# Altium PCB PCB-soldermask.PcbDoc
Units mil, origin at the board's own origin, x right, y up, seen from the top; angles counter-clockwise.
Board outline 2559.06 x 1377.95 mil, 2 copper layers (Top Layer, Bottom Layer); 37 components, 24 nets, 114 pads, 11 vias.
Unrouted connection lines stored in the file: 1.
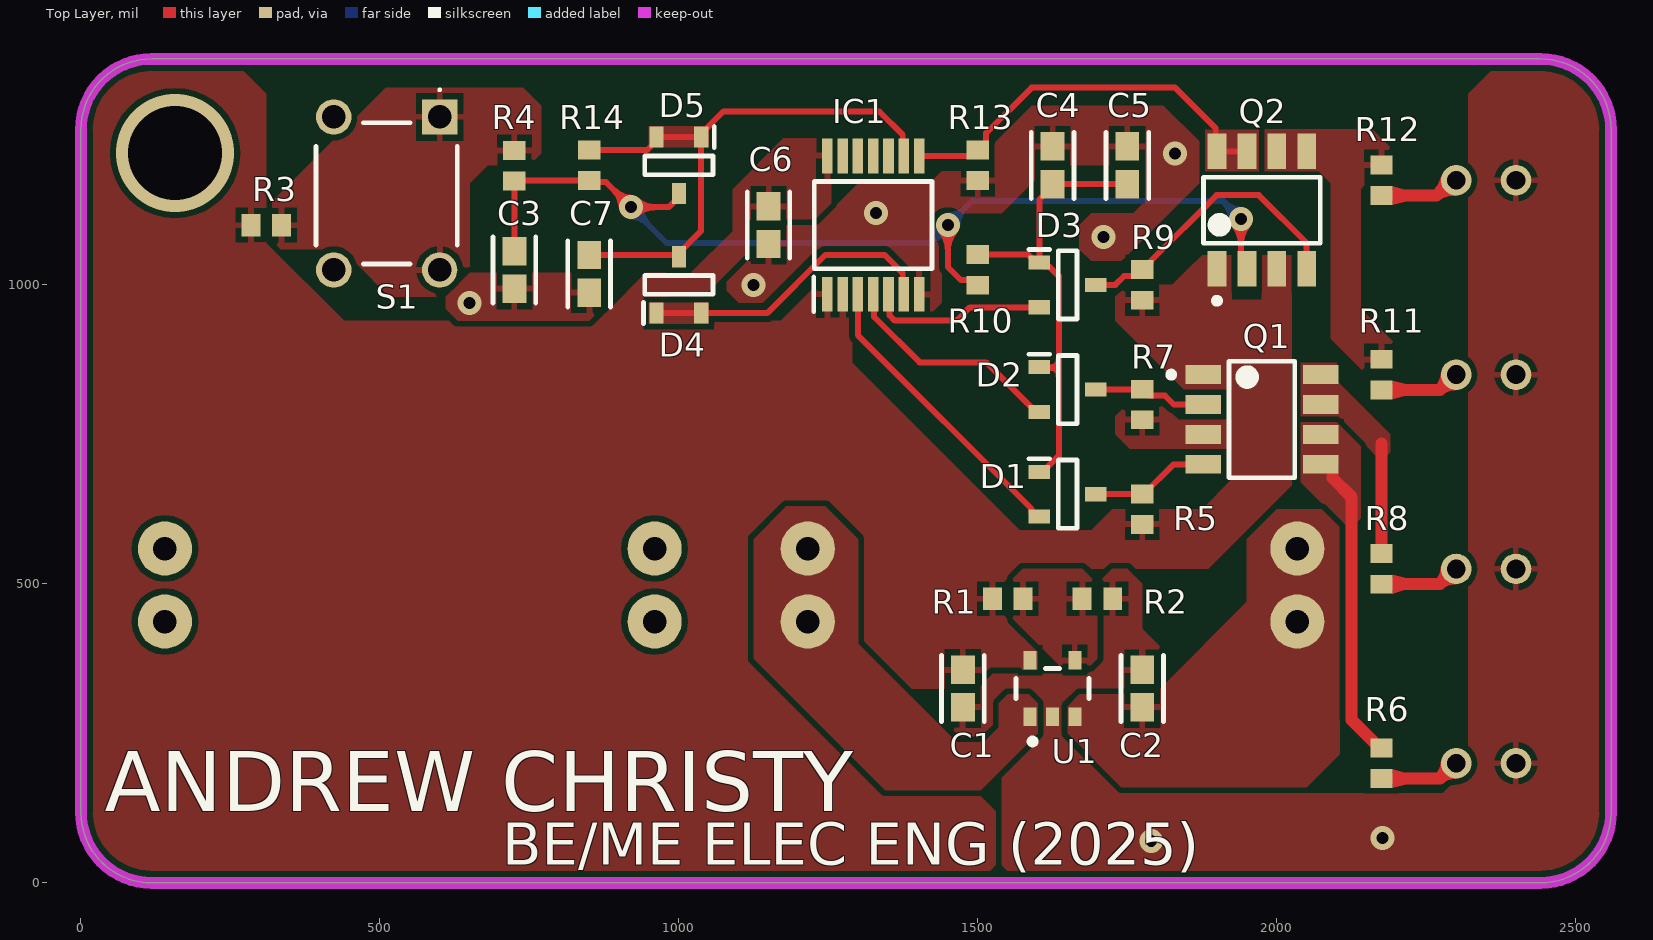
[diagram p0: Top Layer view]
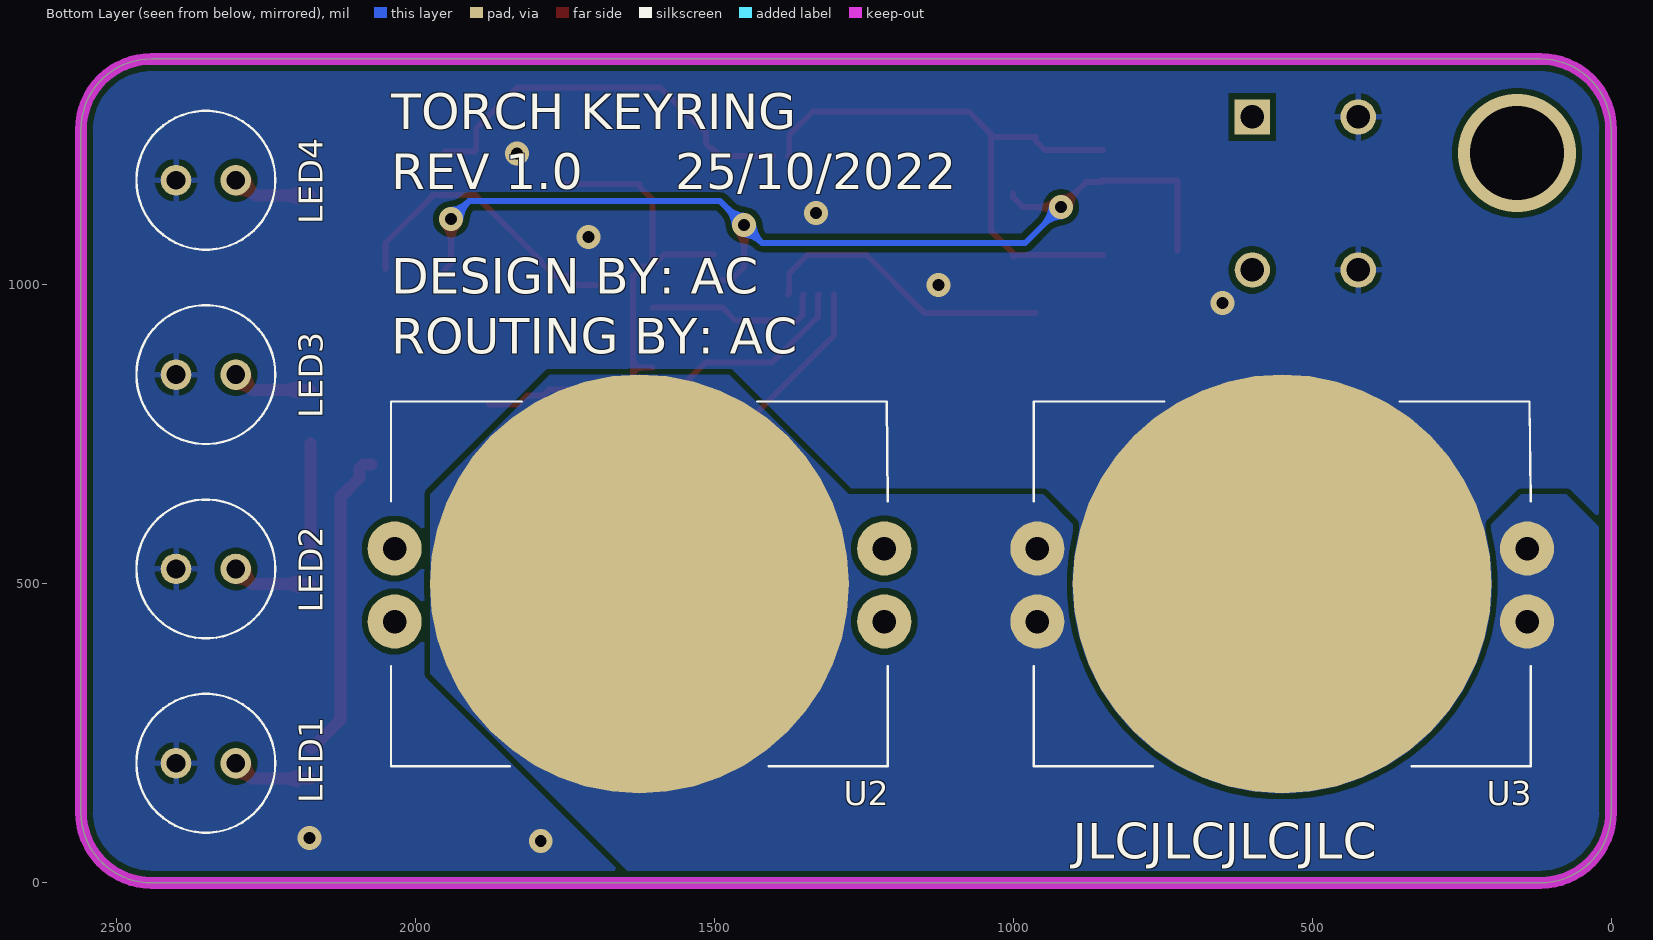
[diagram p1: Bottom Layer view, seen from below]
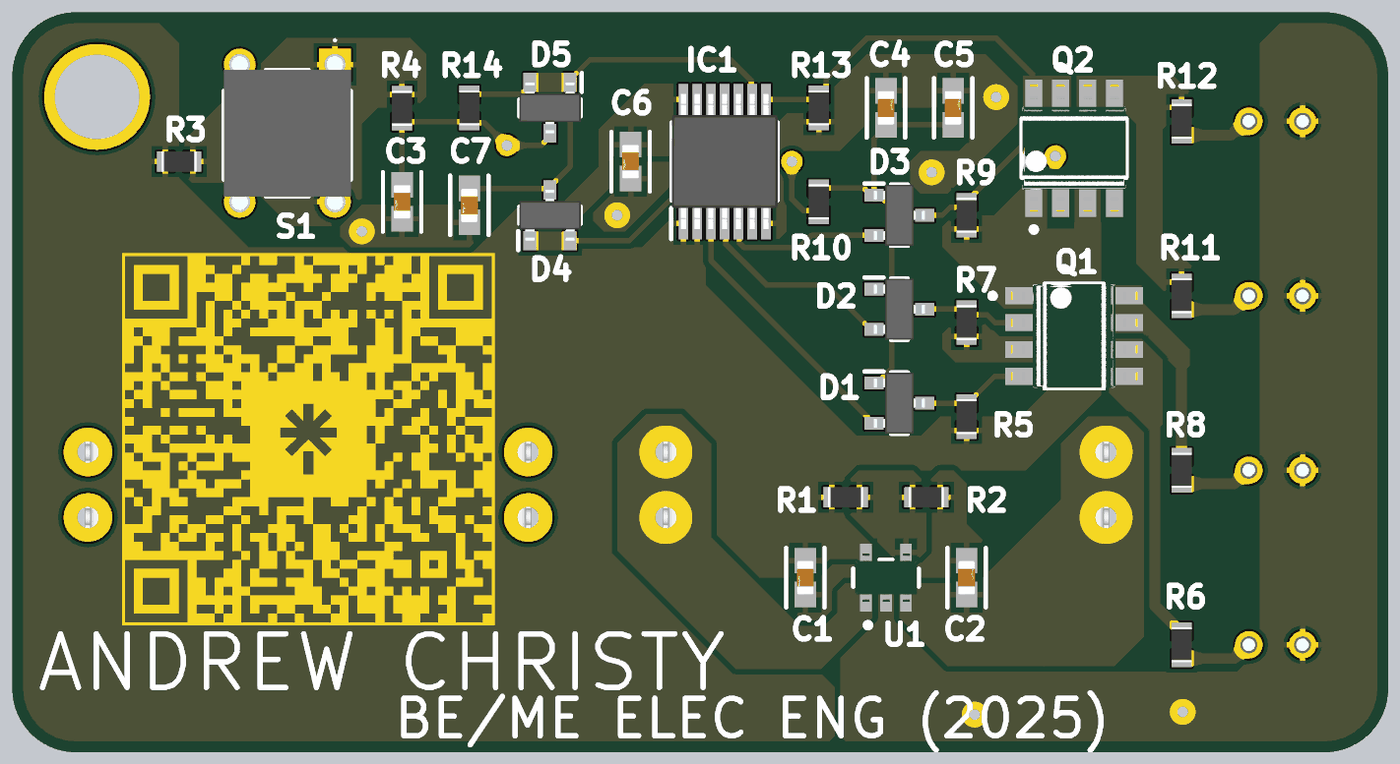
[diagram p2: 3D render of the assembled board from above, using the file's embedded part models]
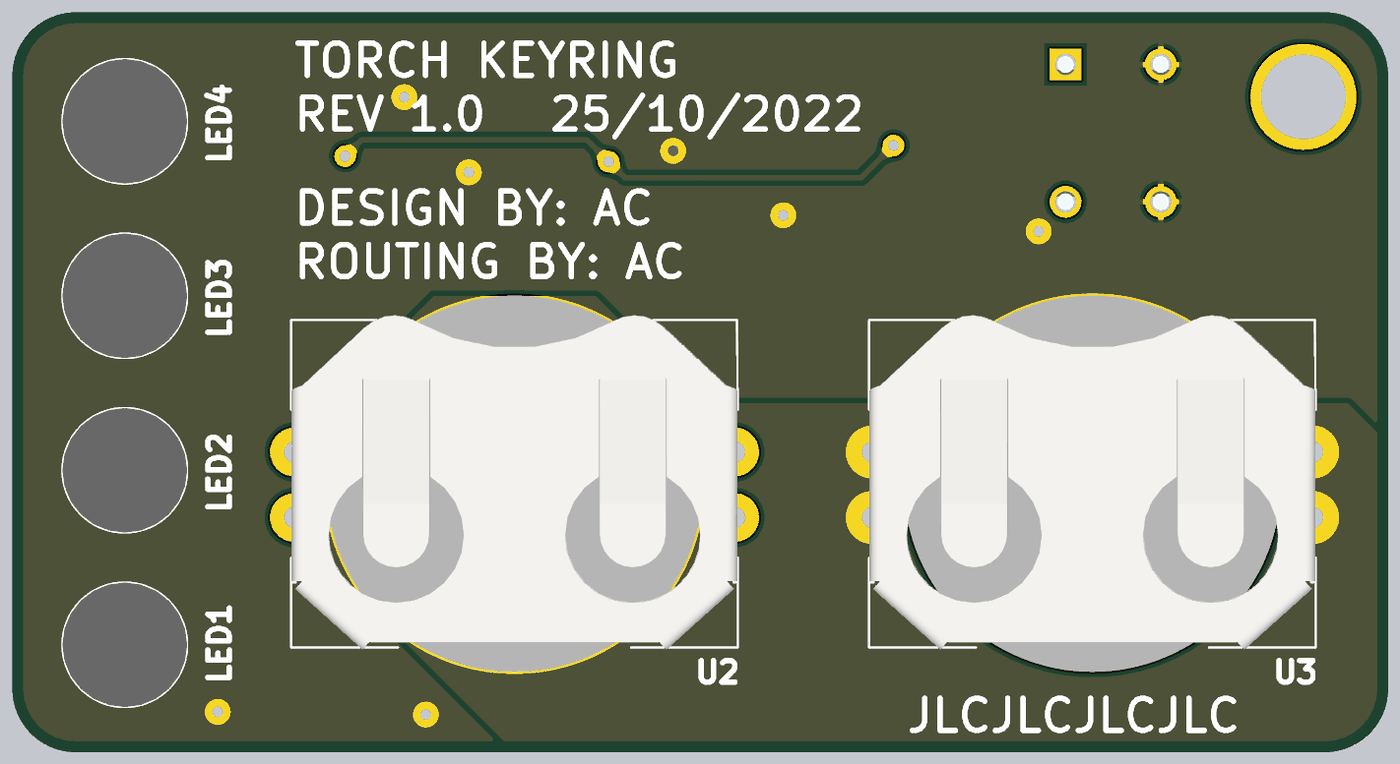
[diagram p3: 3D render of the assembled board from below, using the file's embedded part models]

## Layer stack, top to bottom
Top Solder: solder mask 0.4, Solder Resist, Dk 3.5
Top Layer: signal copper 1.4
Dielectric 1: dielectric 12.6, FR-4, Dk 4.8
Bottom Layer: signal copper 1.4
Bottom Solder: solder mask 0.4, Solder Resist, Dk 3.5

## Board outline
118.11,0 cw(c118.11,118.11) 0,118.11 0,1259.84 cw(c118.11,1259.84) 118.11,1377.95 2440.94,1377.95 cw(c2440.94,1259.84) 2559.06,1259.84 2559.06,118.11 cw(c2440.94,118.11) 2440.94,0

## Design rules (kind name [scope] priority, off if disabled: settings)
Clearance [All] p1: gap=10 ignorepadtopadclearanceinfootprint=FALSE except(0: Arc-Hole Track-Hole SMDPad-Hole THPad-Hole Via-Hole Fill-Hole Poly-Hole Region-Hole Text-Hole)
PolygonConnect [All] p1: connectstyle=Relief reliefconductorwidth=10 reliefentries=4 polygonreliefangle="90 Angle" airgapwidth=10
RoutingVias [All] p1: holewidth=28 width=50 viastyle="Through Hole" minholewidth=28 minwidth=50 maxholewidth=28 maxwidth=50
SolderMaskExpansion [All] p1: expansion=4 istentingtop=FALSE
Width [All] p1: maxlimit=50 minlimit=5 preferedwidth=10
30 further rules are at their usual default settings.

## Components (designator, comment, footprint, x,y, rotation, side; value= is the part's Value field where it differs from the comment)
C1 "2.2uF" FP-GRM188-0_1-E0_2_0_55-IPC_A 1475,325 r270 top
C2 "1uF" FP-GRM188-0_1-E0_2_0_55-IPC_A 1775,325 r90 top
C3 "100nF" FP-GRM188-0_1-E0_2_0_55-IPC_A 725,1025 r270 top
C4 "2.2uF" FP-GRM188-0_1-E0_2_0_55-IPC_A 1625,1200 r90 top
C5 "2.2uF" FP-GRM188-0_1-E0_2_0_55-IPC_A 1750,1200 r90 top
C6 "100nF" FP-GRM188-0_1-E0_2_0_55-IPC_A 1150,1100 r270 top
C7 "2.2uF" FP-GRM188-0_1-E0_2_0_55-IPC_A 850,1018.43 r270 top
D1 "BAW156HYFHT116" SOT95P240X115-3N 1650,650 r0 top
D2 "BAW156HYFHT116" SOT95P240X115-3N 1650,825 r0 top
D3 "BAW156HYFHT116" SOT95P240X115-3N 1650,1000 r0 top
D4 "BAW156HYFHT116" SOT95P240X115-3N 1000,1000 r90 top
D5 "BAW156HYFHT116" SOT95P240X115-3N 1000,1200 r270 top
IC1 "SN74HCS264PWR" SOP65P640X120-14N 1325,1100 r90 top
LED1 "C503D-WAN-CCBEB151" C503DWANCCBEB151 2300,200 r0 bottom
LED2 "C503D-WAN-CCBEB151" C503DWANCCBEB151 2300,525 r0 bottom
LED3 "C503D-WAN-CCBEB151" C503DWANCCBEB151 2300,850 r0 bottom
LED4 "C503D-WAN-CCBEB151" C503DWANCCBEB151 2300,1175 r0 bottom
Q1 "DMP3085LSD-13" FP-SO-8-MFG 1975,775 r0 top
Q2 "DMP3085LSD-13" FP-SO-8-MFG 1975,1125 r90 top
R1 "100k" RESC1609X50X30NL8T20 1550,475 r180 top
R2 "33k" RESC1609X50X30NL8T20 1700,475 r180 top
R3 "100k" RESC1609X50X30NL8T20 310,1100 r180 top
R4 "1k" RESC1609X50X30NL8T20 725,1199.41 r90 top
R5 "1M" RESC1609X50X30NL8T20 1775,625 r270 top
R6 "100R" RESC1609X50X30NL8T20 2175,200 r270 top
R7 "1M" RESC1609X50X30NL8T20 1775,800 r270 top
R8 "100R" RESC1609X50X30NL8T20 2175,525 r270 top
R9 "1M" RESC1609X50X30NL8T20 1775,1000 r270 top
R10 "100k" RESC1609X50X30NL8T20 1500,1025 r90 top
R11 "100R" RESC1609X50X30NL8T20 2175,850 r270 top
R12 "100R" RESC1609X50X30NL8T20 2175,1175 r270 top
R13 "1M" RESC1609X50X30NL8T20 1500,1200 r90 top
R14 "1M" RESC1609X50X30NL8T20 850,1200 r90 top
S1 "TS02-66-43-BK-260-SCR-D" TS026643BK260SCRD 600,1280.91 r270 top
U1 "AP2205-W5-7" FP-SOT25-MFG 1625,325 r90 top
U2 "BAT-HLD-001-THM" BATHLD001THM 1625,500 r180 bottom
U3 "BAT-HLD-001-THM" BATHLD001THM 550,500 r180 bottom

## Footprints (in the part's own frame and the unit in brackets; to place one, negate y for a bottom-side part, rotate by r counter-clockwise, add the part's x,y. Pads: shape width x height; smd on the part's side, far side on the other; paste and mask are expansions set on the pad)
BATHLD001THM [mm]
  round 2.3 hole 1: 1(-10.4,1.5) 2(-10.4,-1.6) 3(10.4,-1.6) 4(10.4,1.5)
  round 17.8 smd: 5(0,0)
  silkscreen extent -10.55,-7.75 10.55,7.75, body extent -10.54,-7.85 10.54,7.97, height 4.29
C503DWANCCBEB151 [mm]
  round 1.3 hole 0.8: 1(0,0) 2(2.54,0)
  silkscreen extent -1.68,-2.95 4.22,2.95, body extent -1.68,-2.95 4.22,2.95, height 10.2
FP-GRM188-0_1-E0_2_0_55-IPC_A [mil]
  rect 47.57x39.85 smd paste+0 mask+0: 1(-31.57,0) 2(31.57,0)
  silkscreen extent -55,-36 55,36, body extent -75,-40 75,40, height 10
FP-SO-8-MFG [mm]
  rect 1.505x0.802 smd paste+0 mask+0: 1(-2.498,1.905) 2(-2.498,0.635) 3(-2.498,-0.635) 4(-2.498,-1.905) 5(2.498,-1.905) 6(2.498,-0.635) 7(2.498,0.635) 8(2.498,1.905)
  silkscreen extent -3.97,-2.47 1.4,2.47, body extent -3.35,-2.58 3.35,2.58, height 0.25
FP-SOT25-MFG [mm]
  rect 0.8x0.55 smd paste+0 mask+0: 1(-1.2,0.95) 2(-1.2,0) 3(-1.2,-0.95) 4(1.2,-0.95) 5(1.2,0.95)
  silkscreen extent -2.37,-1.55 0.85,1.55, body extent -1.7,-1.65 1.7,1.65, height 0.25
RESC1609X50X30NL8T20 [mm] "Chip Resistor, 2-Leads, Body 1.65x0.95mm, IPC Medium Density"
  rect 0.8x0.95 smd: 1(-0.65,0) 2(0.65,0)
  body extent -0.82,-0.48 0.82,0.48, height 0.5
SOP65P640X120-14N [mm]
  rect 1.475x0.45 smd: 1(-2.938,1.95) 2(-2.938,1.3) 3(-2.938,0.65) 4(-2.938,0) 5(-2.938,-0.65) 6(-2.938,-1.3) 7(-2.938,-1.95) 8(2.938,-1.95) 9(2.938,-1.3) 10(2.938,-0.65) 11(2.938,0) 12(2.938,0.65) 13(2.938,1.3) 14(2.938,1.95)
  silkscreen extent -3.67,-2.5 1.85,2.52, body extent -3.2,-2.5 3.2,2.5, height 1.13
SOT95P240X115-3N [mm]
  rect 0.9x0.6 smd: 1(-1.2,0.95) 2(-1.2,-0.95) 3(1.2,0)
  silkscreen extent -1.65,-1.45 0.4,1.5, body extent -1.2,-1.45 1.2,1.45, height 1.15
TS026643BK260SCRD [mm]
  rect 1.5x1.5 hole 1: 1(0,0)
  round 1.5 hole 1: 2(6.5,0) 3(0,-4.5) 4(6.5,-4.5)
  silkscreen extent -1.2,-5.25 6.25,0.75, body extent -0.4,-5.25 6.9,0.75, height 4.6

## Part data
C1 C2 C3 C4 C5 C6 C7: library part CMP-2006-02792-2, "Chip Multilayer Ceramic Capacitors for General Purpose, 0603, 10uF, X5R, 15%, 20%, 6.3V", Capacitance=10uF, Case Code (Imperial)=0603, Case Code (Metric)=1608, Dielectric=X5R, Max Operating Temperature=85°C, Min Operating Temperature=-55°C, Package Quantity=4000, Tolerance=20%, Voltage=6.3V, Case/Package=0603, Depth=0.8mm, Height=0.8mm, Lead Free="Lead Free", Length=1.6mm, Material=Ceramic, Mount="Surface Mount", Packaging="Tape and Reel", Radiation Hardening=No, REACH SVHC="No SVHC", Termination=SMD/SMT, Thickness=0.035inch, Voltage Rating=6.3V, Voltage Rating (DC)=6.3V, Width=0.031inch
D1 D2 D3 D4 D5: "Diode", Manufacturer_Name="ROHM Semiconductor", Datasheet Link=https://fscdn.rohm.com/en/products/databook/datasheet/discrete/diode/switching/baw156hyfht116-e.pdf, Height=1.15mm, Manufacturer_Part_Number=BAW156HYFHT116
IC1: "Integrated Circuit", Manufacturer_Name="Texas Instruments", Mouser Part Number=595-SN74HCS264PWR, Arrow Part Number=SN74HCS264PWR, Arrow Price/Stock=https://www.arrow.com/en/products/sn74hcs264pwr/texas-instruments?region=nac, Datasheet Link=https://www.ti.com/lit/gpn/SN74HCS264, Height=1.2mm, Manufacturer_Part_Number=SN74HCS264PWR, Mouser Price/Stock=https://www.mouser.co.uk/ProductDetail/Texas-Instruments/SN74HCS264PWR?qs=DPoM0jnrROVriykd1NESjA%3D%3D
LED1 LED2 LED3 LED4: "LED", Manufacturer_Name=Wolfspeed, Mouser Part Number=941-C503DWANCCBEB151, Arrow Part Number=C503D-WAN-CCBEB151, Arrow Price/Stock=https://www.arrow.com/en/products/c503d-wan-ccbeb151/cree, Datasheet Link=https://www.cree.com/led-components/media/documents/C503D-WAN-935.pdf, Height=10.1mm, Manufacturer_Part_Number=C503D-WAN-CCBEB151, Mouser Price/Stock=https://www.mouser.co.uk/ProductDetail/Cree-LED/C503D-WAN-CCbEb151?qs=1sbE9T7hb3ZR2lckThU%2FFA%3D%3D
Q1 Q2: library part CMP-12801-000030-1, "MOSFET 2P-CH 30V 3.9A 8SO", Continuous Drain Current=-3.9A, Drain To Source Breakdown Voltage=-30V, Drain To Source Resistance=50mΩ, Gate To Source Voltage=20V, Input Capacitace At Vds="563pF @ -25V", Manufacturer="Diodes Inc.", Max Forward Diode Voltage=-1.2V, Max Junction Temp=+150°C, Package=SO-8, Power Dissipation=1.1W, Pulse Drain Current=-20A, Temperature="-55°C to +150°C", Temperature Range Low=-55°C, Typ Forward Diode Voltage=-0.7V, Automotive=No, Category=Trans, ComponentLink2Description=Datasheet, ComponentLink2URL=https://www.diodes.com/assets/Datasheets/DMP3085LSD.pdf, Depletion Mode=False, Device Class L1="Discrete Semiconductors", Device Class L2=Transistors, Device Class L3=MOSFETs, Digikey Description="MOSFET 2P-CH 30V 3.9A 8SO", Drain To Source Voltage=-30V, Footprint Url=https://www.diodes.com/assets/Package-Files/SO-8.pdf, Gate Charge At Vgs="11nC @ -10V", Height=1.7mm, Ipc Land Pattern Name=SOIC127P600X160-8, Lead Free=Yes, Manufacturer Part Number=DMP3085LSD-13, Mouser Description="MOSFET P-Ch ENH FET -30V 70mOhm -10V -3.9A", Number Of Channels=2, Number Of P Channels=2, Octopart=https://octopart.com/dmp3085lsd-13-diodes+inc.-29925597, RoHS=TRUE, Rthja Max=107°C/W, Standoff Height=0.1mm, Temperature Range High=+150°C, Threshold Vgs Max=-3V, Threshold Vgs Min=-1V, Turn Off Delay Time=31ns, Turn On Delay Time=4.8ns
R1 R2 R3 R4 R5 R6 R7 R8 R9 R10 R11 R12 R13 R14: library part CMP-2000-03816-5, "Chip Resistor, 0 Ohm, Jumper, 100 mW, -55 to 155 degC, 0603 (1608 Metric), RoHS, Tape and Reel", Manufacturer="Vishay Semiconductor", Max Operating Temperature="155 degC", Min Operating Temperature="-55 degC", Package Quantity=5000, Voltage Rating="75 V", ComponentLink1Description="Manufacturer URL", ComponentLink1URL=http://www.vishay.com/, ComponentLink2Description=Datasheet, ComponentLink2URL=http://www.vishay.com/docs/20035/dcrcwe3.pdf, DatasheetVersion=06/2012, Height="0.45 mm", Length="1.55 mm", Mount="Surface Mount", Mounting Technology="Surface Mount", PackageDescription="2-Pin Surface Mount Device, Body 1.575 x 0.85 mm", PackageReference=0603, Packaging="Tape and Reel", Pins=2, REACH SVHC=Unknown, RoHSCompliant=true
S1: "Switch", Manufacturer_Name="CUI Inc.", Mouser Part Number=179-TS026643BK260SCR, Arrow Part Number=TS02-66-43-BK-260-SCR-D, Arrow Price/Stock=https://www.arrow.com/en/products/ts02-66-43-bk-260-scr-d/cui-devices?region=nac, Datasheet Link=https://www.arrow.com/en/products/ts02-66-43-bk-260-scr-d/cui-devices?region=nac, Height=4.5mm, Manufacturer_Part_Number=TS02-66-43-BK-260-SCR-D, Mouser Price/Stock=https://www.mouser.co.uk/ProductDetail/CUI-Devices/TS02-66-43-BK-260-SCR-D?qs=A6eO%252BMLsxmStfetPfb1PWw%3D%3D
U1: library part CMP-12756-000046-1, "IC REG LIN POS ADJ 250MA SOT25"
U2 U3: "Undefined or Miscellaneous", Manufacturer_Name="Linx Technologies", Mouser Part Number=712-BAT-HLD-001-THM, Datasheet Link="http://www.mouser.com/datasheet/2/238/BAT-HLD-001-THM Diagram-1175214.pdf", Height=4.2mm, Manufacturer_Part_Number=BAT-HLD-001-THM, Mouser Price/Stock=https://www.mouser.co.uk/ProductDetail/Linx-Technologies/BAT-HLD-001-THM?qs=Z0V%2FpEl%252BOGcluj3h2QTrDw%3D%3D

## Via types
v1: diameter 40, hole 20, Top Layer to Bottom Layer, 10 vias
v2: diameter 196.85, hole 157.48, Top Layer to Bottom Layer, 1 vias

## Nets (pads, with @x,y where several pads share a name; then routed paths per layer and width w, separated by ;. In a path a pad name is that pad's centre, name@x,y a point inside that pad or via, vN(x,y) a via of type N, cw(c..) or ccw(c..) an arc to the next point about the centre after c; other vN are vias at no path point)
+5: C1.1 C6.1 IC1.1 IC1.2 IC1.14 Q1.1 Q1.3 Q2.1 Q2.3 R1.2 R3.2 R5.2 R7.2 R9.2 U1.5
GND: C1.2 C2.2 C3.2 C4.2 C5.2 C6.2 C7.2 IC1.7 LED1.2 LED2.2 LED3.2 LED4.2 R2.1 R13.1 S1.3 S1.4 U1.2 U3.5
  other v1: 1790,70 2177,75 650,970 1125,1000 1710,1080 1330,1120 1830,1220
NetC4_1: C4.1 C5.1 D1.1 D2.1 D3.1 R10.2 | length 792.2
  Top Layer w10: R10.2 1584.18,1050.59 1590.04,1044.73 1590.04,1044.21 1596.85,1037.4 D3.1 ; D1.1 1608.66,687.4 1635.47,714.21 1635.47,861.81 ; D2.1@1603.35,861.81 1635.47,861.81 ; C5.1 C4.1 1625,1164.57 1602.76,1142.32 D3.1 ; D3.1 1609.57,1030.59 1619.41,1030.59 1635.47,1014.53 1635.47,861.81
NetC7_1: C7.1 D4.3 D5.1 D5.2 IC1.9 R14.2 | length 976.7
  Top Layer w10: C7.1 997.24,1050 D4.3 1000,1053.15 1037.4,1090.55 D5.1 ; R14.2 946.85,1225.59 962.6,1241.34 D5.2 D5.1 ; IC1.9 1374.45,1217.4 1374.45,1250.92 1335.37,1290 1074.51,1290 1037.4,1252.89 D5.1
NetD1_3: D1.3 Q1.4 R5.1 | length 200.1
  Top Layer w10: D1.3 1774.41,650 R5.1 1777.95,650.59 1827.36,700 Q1.4
NetD2_3: D2.3 Q1.2 R7.1 | length 190.3
  Top Layer w10: D2.3 1774.41,825 R7.1 1785.75,814.84 1812.95,814.84 1827.8,800 Q1.2
NetD3_3: D3.3 Q2.4 R9.1 | length 493.1
  Top Layer w10: D3.3 1729.96,1000 1744.8,1014.84 1764.25,1014.84 R9.1 1777.95,1025.59 1788.7,1036.34 1788.7,1039.29 1899.41,1150 1970,1150 2050,1070 Q2.4
NetD4_1: D4.1 D4.2 IC1.6 | length 500.7
  Top Layer w10: D4.1 1147.76,952.76 1245,1050 1344.03,1050 1374.45,1019.58 1374.45,986.06 IC1.6
NetIC1_8: IC1.8 Q2.7 Q2.8 R13.2 | length 668.5
  Top Layer w10: IC1.8 1490.08,1215.67 R13.2@1502.25,1227.84 ; R13.2@1505.21,1227.84 1513.7,1236.34 1513.7,1253.7 1590,1330 1830,1330 1897.91,1262.09 1897.91,1225.42 Q2.8 Q2.7
NetLED1_1: LED1.1 R6.2 | length 135.6
  Top Layer w20: R6.2 2272.69,174.41 2298.28,200 LED1.1
NetLED2_1: LED2.1 R8.2 | length 135.6
  Top Layer w20: R8.2 2183.11,499.41 2183.7,500 2272.69,500 2297.69,525 LED2.1
NetLED3_1: LED3.1 R11.2 | length 135.6
  Top Layer w20: R11.2 2272.69,824.41 2298.28,850 LED3.1
NetLED4_1: LED4.1 R12.2 | length 135.6
  Top Layer w20: R12.2 2266.95,1149.41 2292.54,1175 LED4.1
NetQ1_5: Q1.5 Q1.6 R6.1 | length 526.4
  Top Layer w20: Q1.5 2087.17,700 2092.95,694.21 2092.95,677.42 2125,645.37 2125,272.64 2172.05,225.59 R6.1
NetQ1_7: Q1.7 Q1.8 R8.1 | length 184.4
  Top Layer w20: R8.1 2175,735
NetQ2_5: Q2.5 Q2.6 R11.1 R12.1
NetR1_1: R1.1 R2.2 U1.4
NetR3_1: R3.1 R4.2 S1.1 S1.2
NetU2_5: U2.5 U3.1 U3.2 U3.3 U3.4
Q*0: D1.2 IC1.3 | length 500.8
  Top Layer w10: IC1.3 1299.41,915.94 1590.04,625.32 1590.04,619.41 1596.85,612.6 D1.2
Q*1: D2.2 IC1.4 | length 380.5
  Top Layer w10: IC1.4 1326.73,982.6 1326.73,946.39 1402.72,870.4 1514.05,870.4 1596.85,787.6 D2.2
Q*2: D3.2 IC1.5 | length 299.3
  Top Layer w10: IC1.5 1352.32,982.6 1352.32,949.08 1361.11,940.3 1464.42,940.3 1486.73,962.6 D3.2
sw_out: C3.1 D5.3 Q2.2 R4.1 R10.1 R14.1 | length 1733.1
  Top Layer w10: C3.1 R4.1 725.59,1174.41 R14.1@852.95,1174.41 ; R14.1 852.25,1172.16 877.84,1172.16 v1(920,1130) 983.15,1130 1000,1146.85 D5.3 ; v1(1450,1100) 1450,1030 1471.7,1008.3 1491.11,1008.3 R10.1 ; v1(1940,1110) 1940,1036.67 Q2.2
  Bottom Layer w10: v1(920,1130) 980,1070 1420,1070 v1(1450,1100) 1490,1140 1910,1140 v1(1940,1110)
VCC: C2.1 U1.1 U1.3 U2.1 U2.2 U2.3 U2.4
pads on no net: IC1.10 IC1.11 IC1.12 IC1.13
copper on no net:
  other v2: 157.48,1220.47

## Polygon pours and split planes (outlines as drawn)
GND on Bottom Layer "GND_L02_P031" (solid, pour order 31): 118.11,0 cw(c118.11,118.11) 0,118.11 0,1259.84 cw(c118.11,1259.84) 118.11,1377.95 2440.94,1377.95 cw(c2440.94,1259.84) 2559.06,1259.84 2559.06,118.11 cw(c2440.94,118.11) 2440.94,0
NetU2_5 on Bottom Layer "NETU2_5_L02_P000" (solid, pour order 0): 150,650 75,650 0,575 0,75 75,0 1625,0 1975,350 1975,650 1775,850 1475,850 1275,650 950,650 900,600 900,500 200,500 200,600
GND on Top Layer "Top Layer-GND 2" (solid, pour order 41): 1540,30 1570,0 2490,0 2560,70 2560,1310 2490,1380 2380,1380 2320,1320 2320,192.88 2277.12,150 1739.8,150 1639.8,250 1610.2,250 1540,179.8
NetR3_1 on Top Layer "NETR3_1_L01_P040" (solid, pour order 40): 320,1140 510,1330 740,1330 770,1300 770,1220 750,1200 680,1200 650,1170 650,1020 610,980 516.06,980 436.06,1060 330,1060 320,1070
GND on Top Layer "GND_L01_P037" (solid, pour order 37): 650,1020 610,980 610,960 630,940 850,940 900,990 900,1010 890,1020
GND on Top Layer "Top Layer-GND" (solid, pour order 30): 1540,1120 1620,1200 1779.92,1200 1799.92,1180 1850,1180 1870,1200 1870,1240 1810,1300 1590,1300 1480,1190 1440,1190 1420,1170 1300,1170 1230,1100 1130,1100 1110,1080 1110,1040 1080,1010 1080,990 1100,970 1140,970 1230,1060 1350,1060 1390,1020 1390,950 1420,950 1440,970 1440,1070 1420,1090 1420,1110 1430,1120
+5 on Top Layer "+5_L01_P020" (solid, pour order 20): 1240,1010 1100,870 1290,870 1290,1010
VCC on Top Layer "VCC_L01_P007" (solid, pour order 7): 2075,625 2105,595 2105,215 2050,160 1740,160 1650,250 1650,295 1670,315 1795,315 1950,470 1950,575 2000,625
GND on Top Layer "Top Layer-GND 1" (solid, pour order 11): 1425,275 1465,235 1495,235 1525,265 1525,300 1550,325 1575,325 1600,300 1600,250 1650,250 1650,300 1675,325 1825,325 1825,375 1800,400 1725,400 1675,350 1525,350 1500,325 1450,325 1425,300
GND on Top Layer "GND_L01_P012" (solid, pour order 12): 1700,500 1700,375 1775,375 1800,400 1775,425 1775,500 1750,525 1725,525
+5 on Top Layer "+5_L01_P019" (solid, pour order 19): 1255,1245 1175,1245 1090,1160 1090,1090 1020,1020 945,1020 845,920 960,920 940,940 940,970 950,980 1040,980 1110,1050 1110,1100 1120,1110 1228.11,1110 1255,1136.89
+5 on Top Layer "Top Layer-+5" (solid, pour order 38): 1500,0 1530,30 1530,120 1505,145 1351.06,145 1120,376.06 1120,580 1180,640 1245,640 1310,575 1310,400 1385,325 1500,325 1525,350 1600,350 1600,400 1550,450 1550,500 1575,525 1885,525 2025,665 2025,1050 1975,1050 1975,975 1925,975 1925,1050 1875,1050 1850,1025 1850,825 1925,825 1925,775 1850,775 1850,725 1925,725 1925,675 1875,625 1725,625 1690,590 1570,590 1220,940 440,940 310,1070 310,1320 255,1375 75,1375 0,1300 0,75 75,0
NetC7_1 on Top Layer "NETC6_1_L01_P043" (solid, pour order 43): 950,1265 1050,1265 1050,1230 950,1230
NetD4_1 on Top Layer "NETD4_1_L01_P004" (solid, pour order 4): 950,970 1050,970 1050,935 950,935
NetIC1_8 on Top Layer "NETIC1_8_L01_P042" (solid, pour order 42): 1880,1259.84 1970,1259.84 1970,1190 1880,1190
NetQ1_7 on Top Layer "NETQ1_7_L01_P017" (solid, pour order 17): 2040,870 2040,780 2100,780 2170,710 2180,710 2190,720 2190,750 2100,840 2100,870
GND on Top Layer "GND_L01_P033" (solid, pour order 33): 1779.92,1200 1780,1199.92 1780,1140 1760,1120 1690,1120 1670,1100 1670,1060 1690,1040 1740,1040 1870,1170 1870,1200
+5 on Top Layer "+5_L01_P029" (solid, pour order 29): 1750,1000 1730,980 1730,940 1845,825 1887.5,825 1887.5,1037.5 1875,1050 1825,1000
+5 on Top Layer "+5_L01_P021" (solid, pour order 21): 1850,774.21 1835.79,774.21 1810,800 1750,800 1730,780 1730,750 1754.21,725.79 1850,725.79
NetQ2_5 on Top Layer "Top Layer-NetQ2_5" (solid, pour order 18): 2070,1190 2090,1170 2090,910 2150,850 2200,850 2200,900 2140,960 2140,1160 2160,1180 2200,1180 2200,1220 2160,1260 1980,1260 1980,1190
NetQ1_5 on Top Layer "NETQ1_5_L01_P013" (solid, pour order 13): 2040,770 2040,670 2110,600 2130,600 2140,610 2140,730 2100,770
VCC on Top Layer "VCC_L01_P005" (solid, pour order 5): 1300,575 1245,630 1180,630 1125,575 1125,375 1345,155 1505,155 1600,250 1600,300 1585,315 1550,315 1535,300 1535,260 1510,235 1465,235 1300,400
NetR1_1 on Top Layer "NETR1_1_L01_P008" (solid, pour order 8): 1575,525 1550,500 1550,450 1650,350 1675,350 1700,375 1700,500 1675,525

## Keep-outs
Keep-Out Layer:
  the board outline again, w20

## Silkscreen, mask and mechanical layers (free items; w line width, h text height)
Top Overlay:
  text "ANDREW CHRISTY" at 40,120 h100
  text "BE/ME ELEC ENG (2025)" at 705,30 h70
Bottom Overlay:
  text "TORCH KEYRING" at 2040,1260 h60
  text "25/10/2022" at 1565,1160 h60
  text "REV 1.0" at 2040,1160 h60
  text "DESIGN BY: AC" at 2040,985 h60
  text "ROUTING BY: AC" at 2040,885 h60
  text "JLCJLCJLCJLC" at 900,40 h60
Top Solder:
  drawing of 63 lines, arcs and shapes, not listed